# Altium PCB Adapter.PcbDoc
Units mm, origin at the board's own origin, x right, y up, seen from the top; angles counter-clockwise.
Board outline 12.5 x 53 mm, 2 copper layers (Top Layer, Bottom Layer), stack 1.48 mm thick; 2 components, 24 nets, 52 pads, 8 vias.
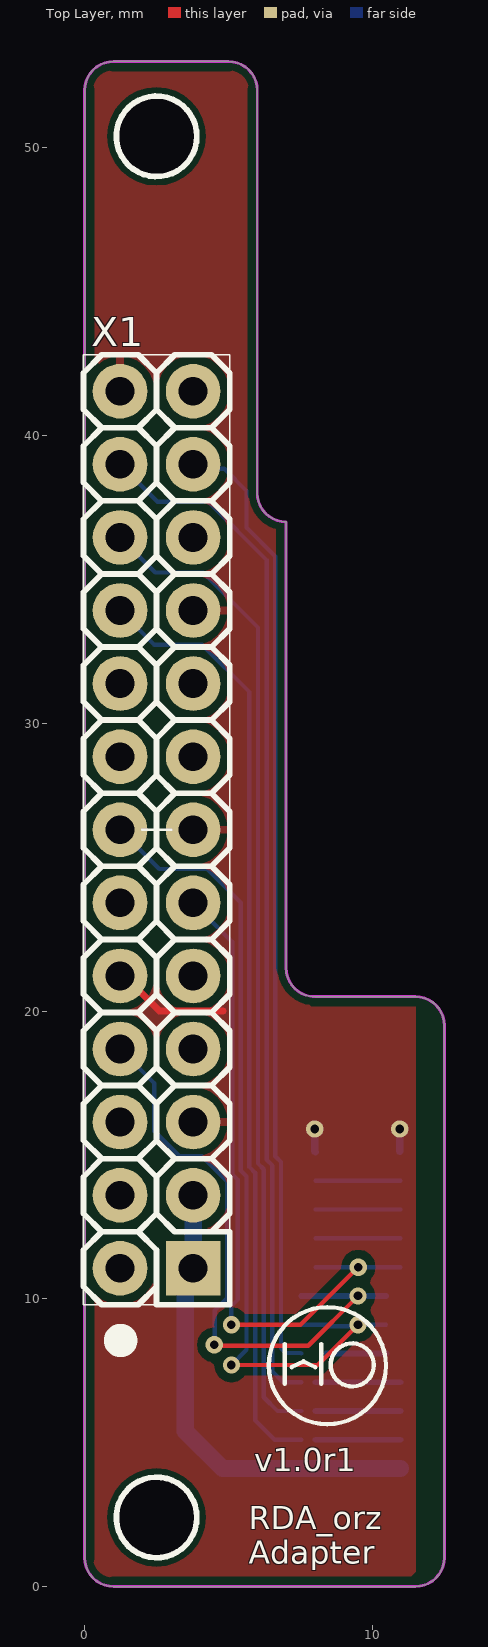
[diagram p0: Top Layer view]
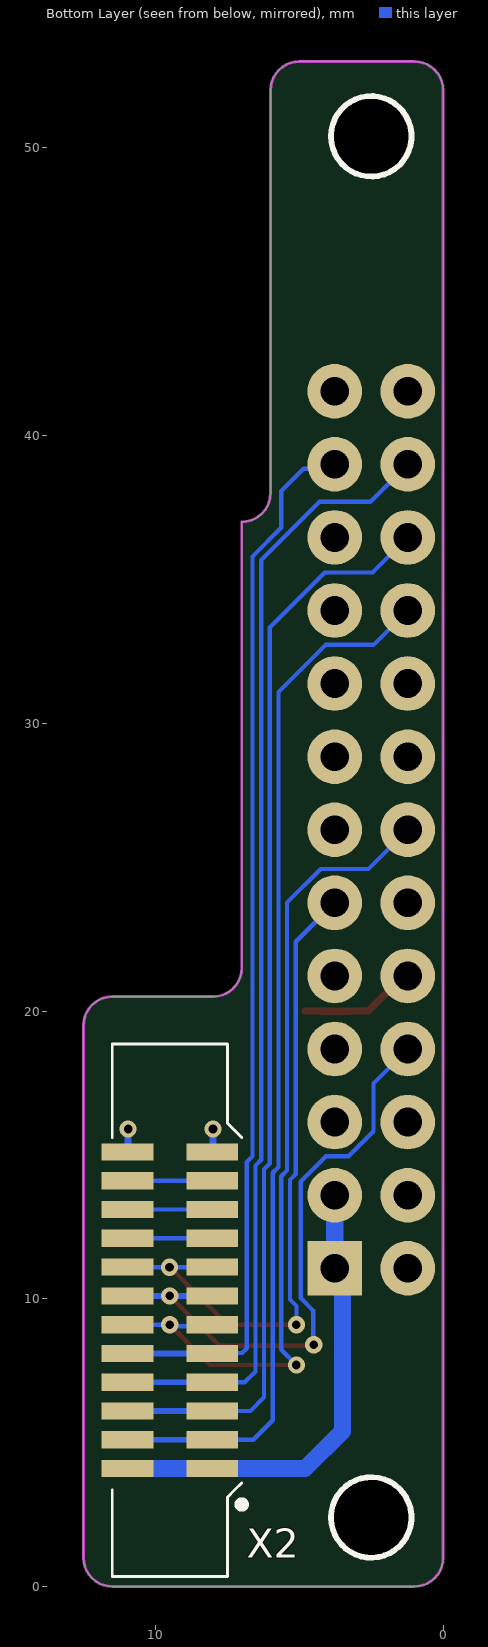
[diagram p1: Bottom Layer view, seen from below]

## Layer stack, top to bottom
Top Solder: solder mask 0.01, Solder Resist, Dk 3.5
Top Layer: signal copper 0.018
Dielectric2: dielectric 1.444, FR-4, Dk 4.8
Bottom Layer: signal copper 0.018
Bottom Solder: solder mask 0.01, Solder Resist, Dk 3.5

## Board outline
1,0 cw(c1,1) 0,1 0,52 cw(c1,52) 1,53 5,53 cw(c5,52) 6,52 6,38 ccw(c7,38) 7,37 7,21.5 ccw(c8,21.5) 8,20.5 11.5,20.5 cw(c11.5,19.5) 12.5,19.5 12.5,1 cw(c11.5,1) 11.5,0

## Design rules (kind name [scope] priority, off if disabled: settings)
BoardOutlineClearance [All] p1: gap=0.3 ignorepadtopadclearanceinfootprint=FALSE
Clearance Clearance_LINE [InNetClass('LINE_NETS')] p1: gap=0.15 ignorepadtopadclearanceinfootprint=FALSE except(0.3: Arc-Poly Track-Track Track-Poly SMDPad-Poly THPad-Poly Via-Poly Fill-Poly Poly-Poly)
Clearance Clearance_Polygon [InPolygon] p2: gap=0.3 ignorepadtopadclearanceinfootprint=FALSE
Clearance [All] p3: gap=0.15 ignorepadtopadclearanceinfootprint=FALSE
ComponentClearance [All] p1: gap=0 collisioncheckmode=3 verticalgap=0 showdistances=FALSE
DiffPairsRouting Diff_USB [InDifferentialPair('USB_D')] p1: maxlimit=0.19 minlimit=0.19 mostfreqgap=0.19 toplayer_minwidth=0.18 toplayer_maxwidth=0.18 toplayer_prefwidth=0.18 bottomlayer_minwidth=0.18 bottomlayer_maxwidth=0.18 bottomlayer_prefwidth=0.18 substack1={EE04066D-737A-4429-AD2D-B4A1881D87B3} toplayer_{ee04066d-737a-4429-ad2d-b4a1881d87b3}_mingap=0.254 toplayer_{ee04066d-737a-4429-ad2d-b4a1881d87b3}_maxgap=0.2 toplayer_{ee04066d-737a-4429-ad2d-b4a1881d87b3}_prefgap=0.254 toplayer_{ee04066d-737a-4429-ad2d-b4a1881d87b3}_minwidth=0.381 toplayer_{ee04066d-737a-4429-ad2d-b4a1881d87b3}_maxwidth=0.381 toplayer_{ee04066d-737a-4429-ad2d-b4a1881d87b3}_prefwidth=0.381 bottomlayer_{ee04066d-737a-4429-ad2d-b4a1881d87b3}_mingap=0.254 bottomlayer_{ee04066d-737a-4429-ad2d-b4a1881d87b3}_maxgap=0.2 bottomlayer_{ee04066d-737a-4429-ad2d-b4a1881d87b3}_prefgap=0.254 bottomlayer_{ee04066d-737a-4429-ad2d-b4a1881d87b3}_minwidth=0.381 bottomlayer_{ee04066d-737a-4429-ad2d-b4a1881d87b3}_maxwidth=0.381 bottomlayer_{ee04066d-737a-4429-ad2d-b4a1881d87b3}_prefwidth=0.381 substack2={98C07B70-F8D9-49CD-8C2F-36B5F8324C10} toplayer_{98c07b70-f8d9-49cd-8c2f-36b5f8324c10}_mingap=0.254 toplayer_{98c07b70-f8d9-49cd-8c2f-36b5f8324c10}_maxgap=0.2 toplayer_{98c07b70-f8d9-49cd-8c2f-36b5f8324c10}_prefgap=0.254 toplayer_{98c07b70-f8d9-49cd-8c2f-36b5f8324c10}_minwidth=0.381 toplayer_{98c07b70-f8d9-49cd-8c2f-36b5f8324c10}_maxwidth=0.381 toplayer_{98c07b70-f8d9-49cd-8c2f-36b5f8324c10}_prefwidth=0.381 bottomlayer_{98c07b70-f8d9-49cd-8c2f-36b5f8324c10}_mingap=0.254 bottomlayer_{98c07b70-f8d9-49cd-8c2f-36b5f8324c10}_maxgap=0.2 bottomlayer_{98c07b70-f8d9-49cd-8c2f-36b5f8324c10}_prefgap=0.254 bottomlayer_{98c07b70-f8d9-49cd-8c2f-36b5f8324c10}_minwidth=0.381 bottomlayer_{98c07b70-f8d9-49cd-8c2f-36b5f8324c10}_maxwidth=0.381 bottomlayer_{98c07b70-f8d9-49cd-8c2f-36b5f8324c10}_prefwidth=0.381 substack3={C8BFD84C-335D-4FE3-8019-BDCBF50C4A84} toplayer_{c8bfd84c-335d-4fe3-8019-bdcbf50c4a84}_mingap=0.254 toplayer_{c8bfd84c-335d-4fe3-8019-bdcbf50c4a84}_maxgap=0.2 toplayer_{c8bfd84c-335d-4fe3-8019-bdcbf50c4a84}_prefgap=0.254 toplayer_{c8bfd84c-335d-4fe3-8019-bdcbf50c4a84}_minwidth=0.381 toplayer_{c8bfd84c-335d-4fe3-8019-bdcbf50c4a84}_maxwidth=0.381 toplayer_{c8bfd84c-335d-4fe3-8019-bdcbf50c4a84}_prefwidth=0.381 bottomlayer_{c8bfd84c-335d-4fe3-8019-bdcbf50c4a84}_mingap=0.254 bottomlayer_{c8bfd84c-335d-4fe3-8019-bdcbf50c4a84}_maxgap=0.2 bottomlayer_{c8bfd84c-335d-4fe3-8019-bdcbf50c4a84}_prefgap=0.254 bottomlayer_{c8bfd84c-335d-4fe3-8019-bdcbf50c4a84}_minwidth=0.381 bottomlayer_{c8bfd84c-335d-4fe3-8019-bdcbf50c4a84}_maxwidth=0.381 bottomlayer_{c8bfd84c-335d-4fe3-8019-bdcbf50c4a84}_prefwidth=0.381 maxuncoupledlength=12.7
DiffPairsRouting Diff_USB_HUB [InDifferentialPair('USBD2')] p2: maxlimit=0.2 minlimit=0.19 mostfreqgap=0.19 toplayer_minwidth=0.18 toplayer_maxwidth=0.2 toplayer_prefwidth=0.18 bottomlayer_minwidth=0.18 bottomlayer_maxwidth=0.2 bottomlayer_prefwidth=0.18 substack1={EE04066D-737A-4429-AD2D-B4A1881D87B3} toplayer_{ee04066d-737a-4429-ad2d-b4a1881d87b3}_mingap=0.254 toplayer_{ee04066d-737a-4429-ad2d-b4a1881d87b3}_maxgap=0.254 toplayer_{ee04066d-737a-4429-ad2d-b4a1881d87b3}_prefgap=0.254 toplayer_{ee04066d-737a-4429-ad2d-b4a1881d87b3}_minwidth=0.381 toplayer_{ee04066d-737a-4429-ad2d-b4a1881d87b3}_maxwidth=0.381 toplayer_{ee04066d-737a-4429-ad2d-b4a1881d87b3}_prefwidth=0.381 bottomlayer_{ee04066d-737a-4429-ad2d-b4a1881d87b3}_mingap=0.254 bottomlayer_{ee04066d-737a-4429-ad2d-b4a1881d87b3}_maxgap=0.254 bottomlayer_{ee04066d-737a-4429-ad2d-b4a1881d87b3}_prefgap=0.254 bottomlayer_{ee04066d-737a-4429-ad2d-b4a1881d87b3}_minwidth=0.381 bottomlayer_{ee04066d-737a-4429-ad2d-b4a1881d87b3}_maxwidth=0.381 bottomlayer_{ee04066d-737a-4429-ad2d-b4a1881d87b3}_prefwidth=0.381 substack2={98C07B70-F8D9-49CD-8C2F-36B5F8324C10} toplayer_{98c07b70-f8d9-49cd-8c2f-36b5f8324c10}_mingap=0.254 toplayer_{98c07b70-f8d9-49cd-8c2f-36b5f8324c10}_maxgap=0.254 toplayer_{98c07b70-f8d9-49cd-8c2f-36b5f8324c10}_prefgap=0.254 toplayer_{98c07b70-f8d9-49cd-8c2f-36b5f8324c10}_minwidth=0.381 toplayer_{98c07b70-f8d9-49cd-8c2f-36b5f8324c10}_maxwidth=0.381 toplayer_{98c07b70-f8d9-49cd-8c2f-36b5f8324c10}_prefwidth=0.381 bottomlayer_{98c07b70-f8d9-49cd-8c2f-36b5f8324c10}_mingap=0.254 bottomlayer_{98c07b70-f8d9-49cd-8c2f-36b5f8324c10}_maxgap=0.254 bottomlayer_{98c07b70-f8d9-49cd-8c2f-36b5f8324c10}_prefgap=0.254 bottomlayer_{98c07b70-f8d9-49cd-8c2f-36b5f8324c10}_minwidth=0.381 bottomlayer_{98c07b70-f8d9-49cd-8c2f-36b5f8324c10}_maxwidth=0.381 bottomlayer_{98c07b70-f8d9-49cd-8c2f-36b5f8324c10}_prefwidth=0.381 substack3={C8BFD84C-335D-4FE3-8019-BDCBF50C4A84} toplayer_{c8bfd84c-335d-4fe3-8019-bdcbf50c4a84}_mingap=0.254 toplayer_{c8bfd84c-335d-4fe3-8019-bdcbf50c4a84}_maxgap=0.254 toplayer_{c8bfd84c-335d-4fe3-8019-bdcbf50c4a84}_prefgap=0.254 toplayer_{c8bfd84c-335d-4fe3-8019-bdcbf50c4a84}_minwidth=0.381 toplayer_{c8bfd84c-335d-4fe3-8019-bdcbf50c4a84}_maxwidth=0.381 toplayer_{c8bfd84c-335d-4fe3-8019-bdcbf50c4a84}_prefwidth=0.381 bottomlayer_{c8bfd84c-335d-4fe3-8019-bdcbf50c4a84}_mingap=0.254 bottomlayer_{c8bfd84c-335d-4fe3-8019-bdcbf50c4a84}_maxgap=0.254 bottomlayer_{c8bfd84c-335d-4fe3-8019-bdcbf50c4a84}_prefgap=0.254 bottomlayer_{c8bfd84c-335d-4fe3-8019-bdcbf50c4a84}_minwidth=0.381 bottomlayer_{c8bfd84c-335d-4fe3-8019-bdcbf50c4a84}_maxwidth=0.381 bottomlayer_{c8bfd84c-335d-4fe3-8019-bdcbf50c4a84}_prefwidth=0.381 maxuncoupledlength=12.7
DiffPairsRouting Diff_Ethernet_TX [InDifferentialPair('TX')] p3: maxlimit=0.165 minlimit=0.165 mostfreqgap=0.165 toplayer_minwidth=0.15 toplayer_maxwidth=0.15 toplayer_prefwidth=0.15 bottomlayer_minwidth=0.15 bottomlayer_maxwidth=0.15 bottomlayer_prefwidth=0.15 substack1={EE04066D-737A-4429-AD2D-B4A1881D87B3} toplayer_{ee04066d-737a-4429-ad2d-b4a1881d87b3}_mingap=0.254 toplayer_{ee04066d-737a-4429-ad2d-b4a1881d87b3}_maxgap=0.2 toplayer_{ee04066d-737a-4429-ad2d-b4a1881d87b3}_prefgap=0.254 toplayer_{ee04066d-737a-4429-ad2d-b4a1881d87b3}_minwidth=0.381 toplayer_{ee04066d-737a-4429-ad2d-b4a1881d87b3}_maxwidth=0.381 toplayer_{ee04066d-737a-4429-ad2d-b4a1881d87b3}_prefwidth=0.381 bottomlayer_{ee04066d-737a-4429-ad2d-b4a1881d87b3}_mingap=0.254 bottomlayer_{ee04066d-737a-4429-ad2d-b4a1881d87b3}_maxgap=0.2 bottomlayer_{ee04066d-737a-4429-ad2d-b4a1881d87b3}_prefgap=0.254 bottomlayer_{ee04066d-737a-4429-ad2d-b4a1881d87b3}_minwidth=0.381 bottomlayer_{ee04066d-737a-4429-ad2d-b4a1881d87b3}_maxwidth=0.381 bottomlayer_{ee04066d-737a-4429-ad2d-b4a1881d87b3}_prefwidth=0.381 substack2={98C07B70-F8D9-49CD-8C2F-36B5F8324C10} toplayer_{98c07b70-f8d9-49cd-8c2f-36b5f8324c10}_mingap=0.254 toplayer_{98c07b70-f8d9-49cd-8c2f-36b5f8324c10}_maxgap=0.35 toplayer_{98c07b70-f8d9-49cd-8c2f-36b5f8324c10}_prefgap=0.254 toplayer_{98c07b70-f8d9-49cd-8c2f-36b5f8324c10}_minwidth=0.15 toplayer_{98c07b70-f8d9-49cd-8c2f-36b5f8324c10}_maxwidth=0.15 toplayer_{98c07b70-f8d9-49cd-8c2f-36b5f8324c10}_prefwidth=0.15 bottomlayer_{98c07b70-f8d9-49cd-8c2f-36b5f8324c10}_mingap=0.254 bottomlayer_{98c07b70-f8d9-49cd-8c2f-36b5f8324c10}_maxgap=0.35 bottomlayer_{98c07b70-f8d9-49cd-8c2f-36b5f8324c10}_prefgap=0.254 bottomlayer_{98c07b70-f8d9-49cd-8c2f-36b5f8324c10}_minwidth=0.15 bottomlayer_{98c07b70-f8d9-49cd-8c2f-36b5f8324c10}_maxwidth=0.15 bottomlayer_{98c07b70-f8d9-49cd-8c2f-36b5f8324c10}_prefwidth=0.15 substack3={C8BFD84C-335D-4FE3-8019-BDCBF50C4A84} toplayer_{c8bfd84c-335d-4fe3-8019-bdcbf50c4a84}_mingap=0.254 toplayer_{c8bfd84c-335d-4fe3-8019-bdcbf50c4a84}_maxgap=0.2 toplayer_{c8bfd84c-335d-4fe3-8019-bdcbf50c4a84}_prefgap=0.254 toplayer_{c8bfd84c-335d-4fe3-8019-bdcbf50c4a84}_minwidth=0.381 toplayer_{c8bfd84c-335d-4fe3-8019-bdcbf50c4a84}_maxwidth=0.381 toplayer_{c8bfd84c-335d-4fe3-8019-bdcbf50c4a84}_prefwidth=0.381 bottomlayer_{c8bfd84c-335d-4fe3-8019-bdcbf50c4a84}_mingap=0.254 bottomlayer_{c8bfd84c-335d-4fe3-8019-bdcbf50c4a84}_maxgap=0.2 bottomlayer_{c8bfd84c-335d-4fe3-8019-bdcbf50c4a84}_prefgap=0.254 bottomlayer_{c8bfd84c-335d-4fe3-8019-bdcbf50c4a84}_minwidth=0.381 bottomlayer_{c8bfd84c-335d-4fe3-8019-bdcbf50c4a84}_maxwidth=0.381 bottomlayer_{c8bfd84c-335d-4fe3-8019-bdcbf50c4a84}_prefwidth=0.381 maxuncoupledlength=12
DiffPairsRouting Diff_Ethernet_RX [InDifferentialPair('RX')] p4: maxlimit=0.165 minlimit=0.165 mostfreqgap=0.165 toplayer_minwidth=0.15 toplayer_maxwidth=0.15 toplayer_prefwidth=0.15 bottomlayer_minwidth=0.15 bottomlayer_maxwidth=0.15 bottomlayer_prefwidth=0.15 substack1={EE04066D-737A-4429-AD2D-B4A1881D87B3} toplayer_{ee04066d-737a-4429-ad2d-b4a1881d87b3}_mingap=0.254 toplayer_{ee04066d-737a-4429-ad2d-b4a1881d87b3}_maxgap=0.2 toplayer_{ee04066d-737a-4429-ad2d-b4a1881d87b3}_prefgap=0.254 toplayer_{ee04066d-737a-4429-ad2d-b4a1881d87b3}_minwidth=0.381 toplayer_{ee04066d-737a-4429-ad2d-b4a1881d87b3}_maxwidth=0.381 toplayer_{ee04066d-737a-4429-ad2d-b4a1881d87b3}_prefwidth=0.381 bottomlayer_{ee04066d-737a-4429-ad2d-b4a1881d87b3}_mingap=0.254 bottomlayer_{ee04066d-737a-4429-ad2d-b4a1881d87b3}_maxgap=0.2 bottomlayer_{ee04066d-737a-4429-ad2d-b4a1881d87b3}_prefgap=0.254 bottomlayer_{ee04066d-737a-4429-ad2d-b4a1881d87b3}_minwidth=0.381 bottomlayer_{ee04066d-737a-4429-ad2d-b4a1881d87b3}_maxwidth=0.381 bottomlayer_{ee04066d-737a-4429-ad2d-b4a1881d87b3}_prefwidth=0.381 substack2={98C07B70-F8D9-49CD-8C2F-36B5F8324C10} toplayer_{98c07b70-f8d9-49cd-8c2f-36b5f8324c10}_mingap=0.254 toplayer_{98c07b70-f8d9-49cd-8c2f-36b5f8324c10}_maxgap=0.35 toplayer_{98c07b70-f8d9-49cd-8c2f-36b5f8324c10}_prefgap=0.254 toplayer_{98c07b70-f8d9-49cd-8c2f-36b5f8324c10}_minwidth=0.15 toplayer_{98c07b70-f8d9-49cd-8c2f-36b5f8324c10}_maxwidth=0.15 toplayer_{98c07b70-f8d9-49cd-8c2f-36b5f8324c10}_prefwidth=0.15 bottomlayer_{98c07b70-f8d9-49cd-8c2f-36b5f8324c10}_mingap=0.254 bottomlayer_{98c07b70-f8d9-49cd-8c2f-36b5f8324c10}_maxgap=0.35 bottomlayer_{98c07b70-f8d9-49cd-8c2f-36b5f8324c10}_prefgap=0.254 bottomlayer_{98c07b70-f8d9-49cd-8c2f-36b5f8324c10}_minwidth=0.15 bottomlayer_{98c07b70-f8d9-49cd-8c2f-36b5f8324c10}_maxwidth=0.15 bottomlayer_{98c07b70-f8d9-49cd-8c2f-36b5f8324c10}_prefwidth=0.15 substack3={C8BFD84C-335D-4FE3-8019-BDCBF50C4A84} toplayer_{c8bfd84c-335d-4fe3-8019-bdcbf50c4a84}_mingap=0.254 toplayer_{c8bfd84c-335d-4fe3-8019-bdcbf50c4a84}_maxgap=0.2 toplayer_{c8bfd84c-335d-4fe3-8019-bdcbf50c4a84}_prefgap=0.254 toplayer_{c8bfd84c-335d-4fe3-8019-bdcbf50c4a84}_minwidth=0.381 toplayer_{c8bfd84c-335d-4fe3-8019-bdcbf50c4a84}_maxwidth=0.381 toplayer_{c8bfd84c-335d-4fe3-8019-bdcbf50c4a84}_prefwidth=0.381 bottomlayer_{c8bfd84c-335d-4fe3-8019-bdcbf50c4a84}_mingap=0.254 bottomlayer_{c8bfd84c-335d-4fe3-8019-bdcbf50c4a84}_maxgap=0.2 bottomlayer_{c8bfd84c-335d-4fe3-8019-bdcbf50c4a84}_prefgap=0.254 bottomlayer_{c8bfd84c-335d-4fe3-8019-bdcbf50c4a84}_minwidth=0.381 bottomlayer_{c8bfd84c-335d-4fe3-8019-bdcbf50c4a84}_maxwidth=0.381 bottomlayer_{c8bfd84c-335d-4fe3-8019-bdcbf50c4a84}_prefwidth=0.381 maxuncoupledlength=12
Height [All] p1: minheight=0 maxheight=50 prefheight=12.7
HoleSize [All] p1: absolutevalues=TRUE maxlimit=5 minlimit=0.025 maxpercent=80.000 minpercent=20.000
MatchedLengths MatchedLengths2 [All] p1: tolerance=0.1 checknetsindiffpair=TRUE checkdiffpairvsdiffpair=FALSE checkxsignals=FALSE checkothers=FALSE
MinimumSolderMaskSliver [All] p1: minsoldermaskwidth=0.1
PolygonConnect [All] p1: thpad.connectstyle=Relief thpad.reliefconductorwidth=0.254 thpad.reliefentries=4 thpad.polygonreliefangle="90 Angle" thpad.airgapwidth=0.254 smdpad.connectstyle=Relief smdpad.reliefconductorwidth=0.254 smdpad.reliefentries=4 smdpad.polygonreliefangle="90 Angle" smdpad.airgapwidth=0.254 via.connectstyle=Direct via.reliefconductorwidth=0.254 via.reliefentries=4 via.polygonreliefangle="90 Angle" via.airgapwidth=0.254
RoutingVias [All] p1: holewidth=0.3 width=0.6 viastyle="Through Hole" minholewidth=0.3 minwidth=0.6 maxholewidth=4.5 maxwidth=4.9
SMDEntry [All] p1: side=TRUE corner=FALSE anyangle=FALSE
SMDToPlane [All] p1: distance=393701
SilkToSilkClearance [All] p1: silktosilkclearance=0
SilkToSolderMaskClearance [IsPad] p1: minsilkscreentomaskgap=0 clearancetoexposedcopper=TRUE
SolderMaskExpansion [All] p1: expansion=0.102 istentingtop=FALSE
Width [All] p1: maxlimit=10 minlimit=0.15 preferedwidth=0.15 substack1={EE04066D-737A-4429-AD2D-B4A1881D87B3} substack2={98C07B70-F8D9-49CD-8C2F-36B5F8324C10} substack3={C8BFD84C-335D-4FE3-8019-BDCBF50C4A84} minimp=50.000000 maximp=50.000000 favimp=50.000000
23 further rules are at their usual default settings.

## Components (designator, comment, footprint, x,y, rotation, side; value= is the part's Value field where it differs from the comment)
X1 "JN5169" "MOD: ORANGE PI ZERO 2 (26PIN ONLY) MIRROR CUT" 5,52.8 r180 top (schematic designator *)
X2 ", 20pin, 2.54mm, 500VAC, 3A" "CON: 0526101233" 9.5,9.6 r90 bottom

## Footprints (in the part's own frame and the unit in brackets; to place one, negate y for a bottom-side part, rotate by r counter-clockwise, add the part's x,y. Pads: shape width x height; smd on the part's side, far side on the other; paste and mask are expansions set on the pad)
"CON: 0526101233" [mm] "FPC 1mm 12pin"
  rect 0.6x1.8 smd: 1(-5.5,-1.475) 1(-5.5,1.475) 2(-4.5,-1.475) 2(-4.5,1.475) 3(-3.5,-1.475) 3(-3.5,1.475) 4(-2.5,-1.475) 4(-2.5,1.475) 5(-1.5,-1.475) 5(-1.5,1.475) 6(-0.5,-1.475) 6(-0.5,1.475) 7(0.5,-1.475) 7(0.5,1.475) 8(1.5,-1.475) 8(1.5,1.475) 9(2.5,-1.475) 9(2.5,1.475) 10(3.5,-1.475) 10(3.5,1.475) 11(4.5,-1.475) 11(4.5,1.475) 12(5.5,-1.475) 12(5.5,1.475)
  silkscreen extent -9.25,-2.6 9.25,2, body extent -9.3,-2.25 9.3,2.25, height 5.7
"MOD: ORANGE PI ZERO 2 (26PIN ONLY) MIRROR CUT" [mm] "Orange pi zero 2 mirror"
  round 1.9 hole 1: 1(3.77,41.74) 3(3.77,39.2) 4(1.23,39.2) 5(3.77,36.66) 6(1.23,36.66) 7(3.77,34.12) 8(1.23,34.12) 9(3.77,31.58) 10(1.23,31.58) 11(3.77,29.04) 12(1.23,29.04) 13(3.77,26.5) 14(1.23,26.5) 15(3.77,23.96) 16(1.23,23.96) 17(3.77,21.42) 18(1.23,21.42) 19(3.77,18.88) 20(1.23,18.88) 21(3.77,16.34) 22(1.23,16.34) 23(3.77,13.8) 24(1.23,13.8) 25(3.77,11.26) 26(1.23,11.26)
  rect 1.9x1.9 hole 1: 2(1.23,41.74)
  silkscreen extent -0.04,1 5.04,51.8

## Part data
X1: library part "OrangePi Zero 2(26pin only)", TYPE=Module
X2: library part "CON: 12 Pin V1", CurrentMax=3A, Manufacturer=Connfly, PartNumber=PLS-20, VoltageMax=500VAC, CommentText="\"Text\"", HelpURL=https://www.chipdip.ru/product/pls-20, Multichannel=20pin, Pitch=2.54mm, TYPE=Connector, ValueManufacturerPartNumber=", 20pin, 2.54mm, 500VAC, 3A"

## Free pads (board coordinates)
  round 0 hole 2.8: ""(2.5,2.4) ""(2.5,50.4)

## Via types
v1: diameter 0.6, hole 0.3, Top Layer to Bottom Layer, tented both sides, 8 vias

## Nets (pads, with @x,y where several pads share a name; then routed paths per layer and width w, separated by ;. In a path a pad name is that pad's centre, name@x,y a point inside that pad or via, vN(x,y) a via of type N, cw(c..) or ccw(c..) an arc to the next point about the centre after c; other vN are vias at no path point)
+5V: X1.2 X1.4 X2.1 | length 16.3
  Bottom Layer w0.6: X1.4 X1.2 3.5,10.79 3.5,5.4 4.8,4.1 7.525,4.1 8.025,4.1 10.475,4.1 10.9,4.1 X2.1@10.975,4.1
Boot: X1.12 X2.8 | length 23.6
  Top Layer w0.15: v1(5.1,9.1) 7.5,9.1 9.498,11.098 v1(9.51,11.098)
  Bottom Layer w0.15: X1.12 5.125,22.405 5.125,14.331 5.325,14.131 5.325,9.973 5.1,9.748 v1(5.1,9.1) ; X2.8@8.025,11.1 8.925,11.1 8.927,11.098 v1(9.51,11.098) 10.973,11.098 X2.8@10.975,11.1
CS0: X1.24 X2.5 | length 35.4
  Bottom Layer w0.15: X1.24 3.927,38.843 4.857,38.843 5.625,38.075 5.625,36.799 6.625,35.799 6.625,14.952 6.825,14.752 6.825,8.275 6.988,8.112 7.513,8.112 X2.5@7.525,8.1
  Bottom Layer w0.2: X2.5@8.4,8.1 10.475,8.1 X2.5@10.5,8.1
GND: X1.6 X1.9 X1.14 X1.20 X1.25 X2.12 | length 5.7
  Top Layer w0.25: X1.9 1.38,21.22 2.6,20 3.258,20 3.263,19.995 4.277,19.995 4.282,20 4.8,20
  Bottom Layer w0.25: v1(8,15.9) 8,15.125 X2.12@8.025,15.1 ; X2.12@10.95,15.125 v1(10.95,15.9)
Net*_1: X1.1
Net*_3: X1.3
Net*_5: X1.5
Net*_8: X1.8
Net*_10: X1.10
Net*_11: X1.11
Net*_15: X1.15
Net*_16: X1.16
Net*_17: X1.17
Net*_18: X1.18
Net*_22: X1.22
Net*_26: X1.26
NetX2_9: X2.9 | length 3
  Bottom Layer w0.15: X2.9@8.025,12.1 X2.9@10.975,12.1
NetX2_10: X2.10 | length 3
  Bottom Layer w0.15: X2.10@8.025,13.1 X2.10@10.975,13.1
NetX2_11: X2.11 | length 3
  Bottom Layer w0.15: X2.11@8.025,14.1 X2.11@10.975,14.1
RPI_LED: X1.7 X2.7 | length 21.1
  Top Layer w0.15: v1@4.52,8.369 7.769,8.369 v1(9.5,10.1)
  Bottom Layer w0.15: X1.7 2.424,17.486 2.424,15.824 3.293,14.955 4.076,14.955 4.945,14.087 4.945,10.017 4.52,9.592 v1@4.52,8.369
  Bottom Layer w0.2: X2.7@7.525,10.1 8.025,10.1 v1(9.5,10.1) X2.7@10.475,10.1
  other v1: 4.5,8.4
RST: X1.13 X2.6 | length 29.6
  Top Layer w0.15: v1(5.1,7.7) 8.1,7.7 v1(9.5,9.1)
  Bottom Layer w0.15: X1.13 2.595,24.935 4.257,24.935 5.425,23.767 5.425,14.455 5.625,14.255 5.625,8.225 v1(5.1,7.7) ; X2.6@7.525,9.1 8.425,9.1 8.48,9.045 9.52,9.045 9.575,9.1 X2.6@10.475,9.1
SPI_MISO: X1.21 X2.3 | length 37.4
  Bottom Layer w0.15: X1.21 2.452,35.238 4.113,35.238 6.025,33.327 6.025,14.704 6.225,14.504 6.225,8.634 6.225,6.575 6.7,6.1 X2.3@7.525,6.1
  Bottom Layer w0.2: X2.3@8.025,6.1 X2.3@10.975,6.1
SPI_MOSI: X1.19 X2.2 | length 35.9
  Bottom Layer w0.15: X1.19 2.424,32.726 4.086,32.726 5.725,31.087 5.725,14.579 5.925,14.379 5.925,8.758 5.925,5.775 6.6,5.1 X2.2@7.525,5.1
  Bottom Layer w0.2: X2.2@8.025,5.1 X2.2@10.975,5.1
SPI_SCK: X1.23 X2.4 | length 38.9
  Bottom Layer w0.15: X1.23 2.53,37.7 4.3,37.7 6.325,35.675 6.325,14.828 6.525,14.628 6.525,7.475 6.9,7.1 X2.4@7.525,7.1
  Bottom Layer w0.2: X2.4@8.025,7.1 X2.4@10.975,7.1

## Polygon pours and split planes (outlines as drawn)
GND on Top Layer "GND_L01_P054" (solid, remove dead copper, pour order 54): 11.5,0 -2.4,0 -2.4,58.4 11.5,58.4

## Keep-outs
Keep-Out Layer:
  lines w0.1: 0,1 ccw(c1,1) 1,0 6.4,0 11.5,0 ccw(c11.5,1) 12.5,1 12.5,7.8 12.5,19.5 ccw(c11.5,19.5) 11.5,20.5 8,20.5 cw(c8,21.5) 7,21.5 7,37 cw(c7,38) 6,38 6,52 ccw(c5,52) 5,53 1,53 ccw(c1,52) 0,52 0,1

## Silkscreen, mask and mechanical layers (free items; w line width, h text height)
Top Overlay:
  circle w0.15: c9.3,7.7 r0.75
  circle w0.15: c8.435,7.675 r2.035
  lines w0.15: 6.95,7.05 6.95,8.425 ; 7.193,7.624 7.607,7.826 8.018,7.62 ; 8.225,7.05 8.225,8.425
  text "v1.0r1" at 5.9,4 h0.8
  text "RDA_orz / Adapter" at 5.7,0.79 h0.8